# EAGLE board carillon-io-board (EAGLE 9.4.2)
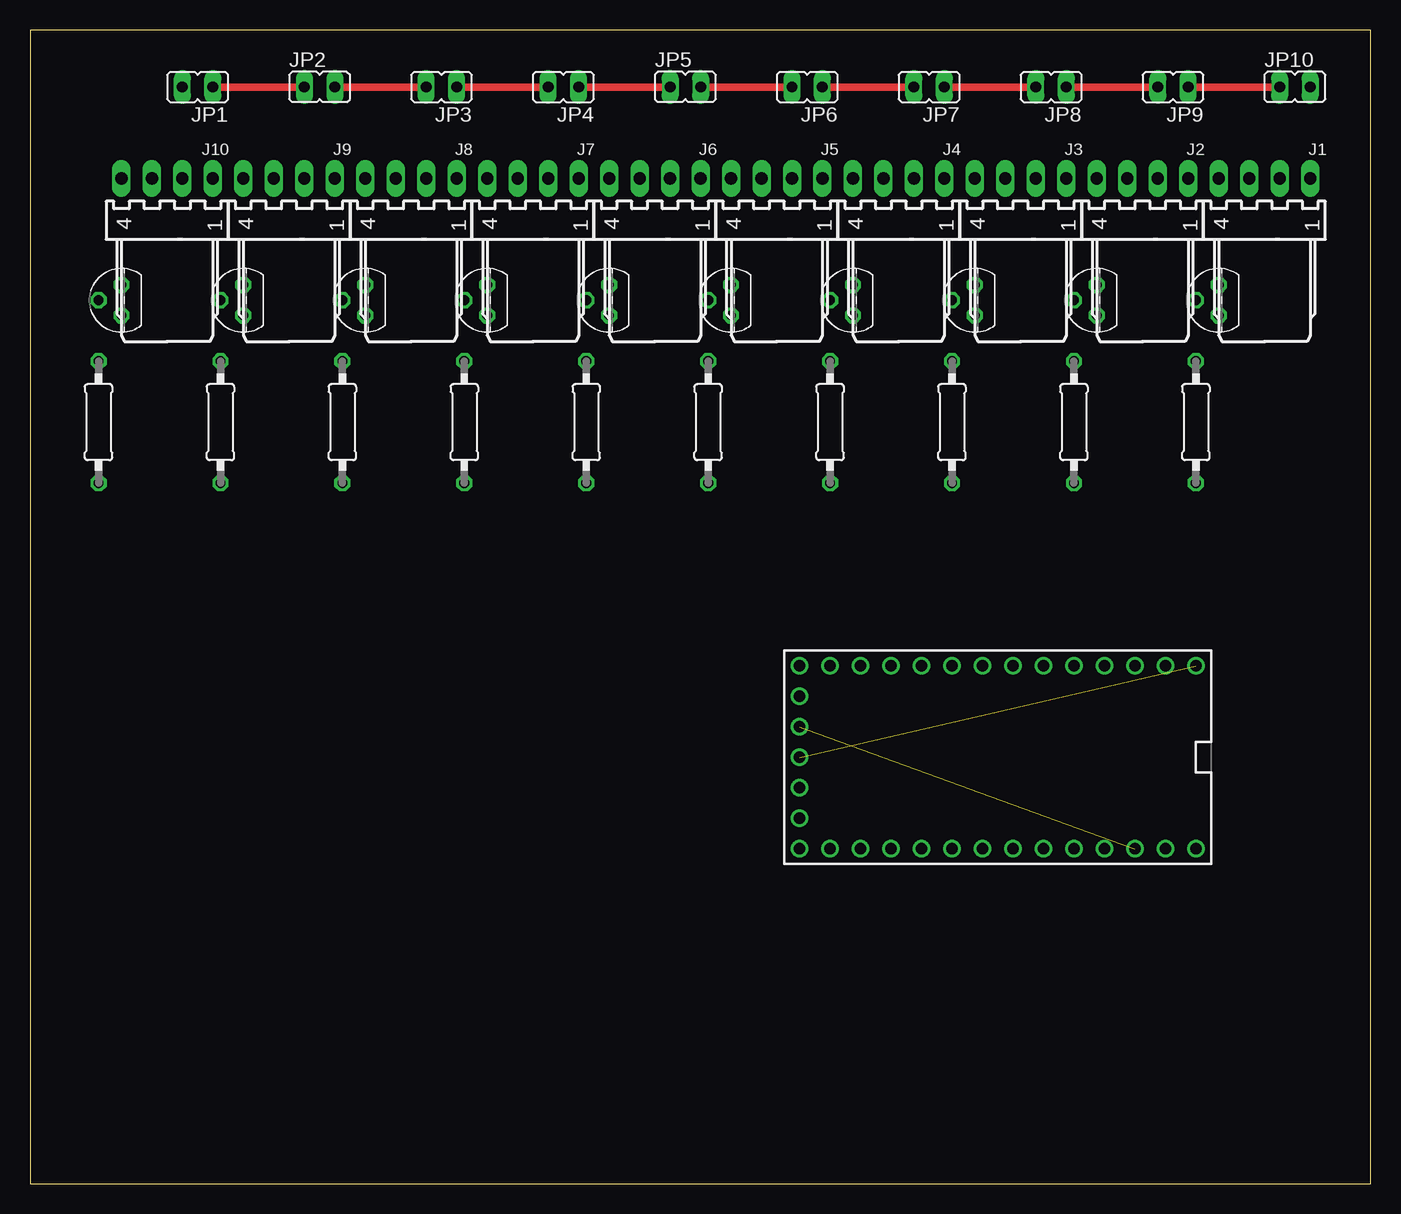
[diagram p0: board, top side]
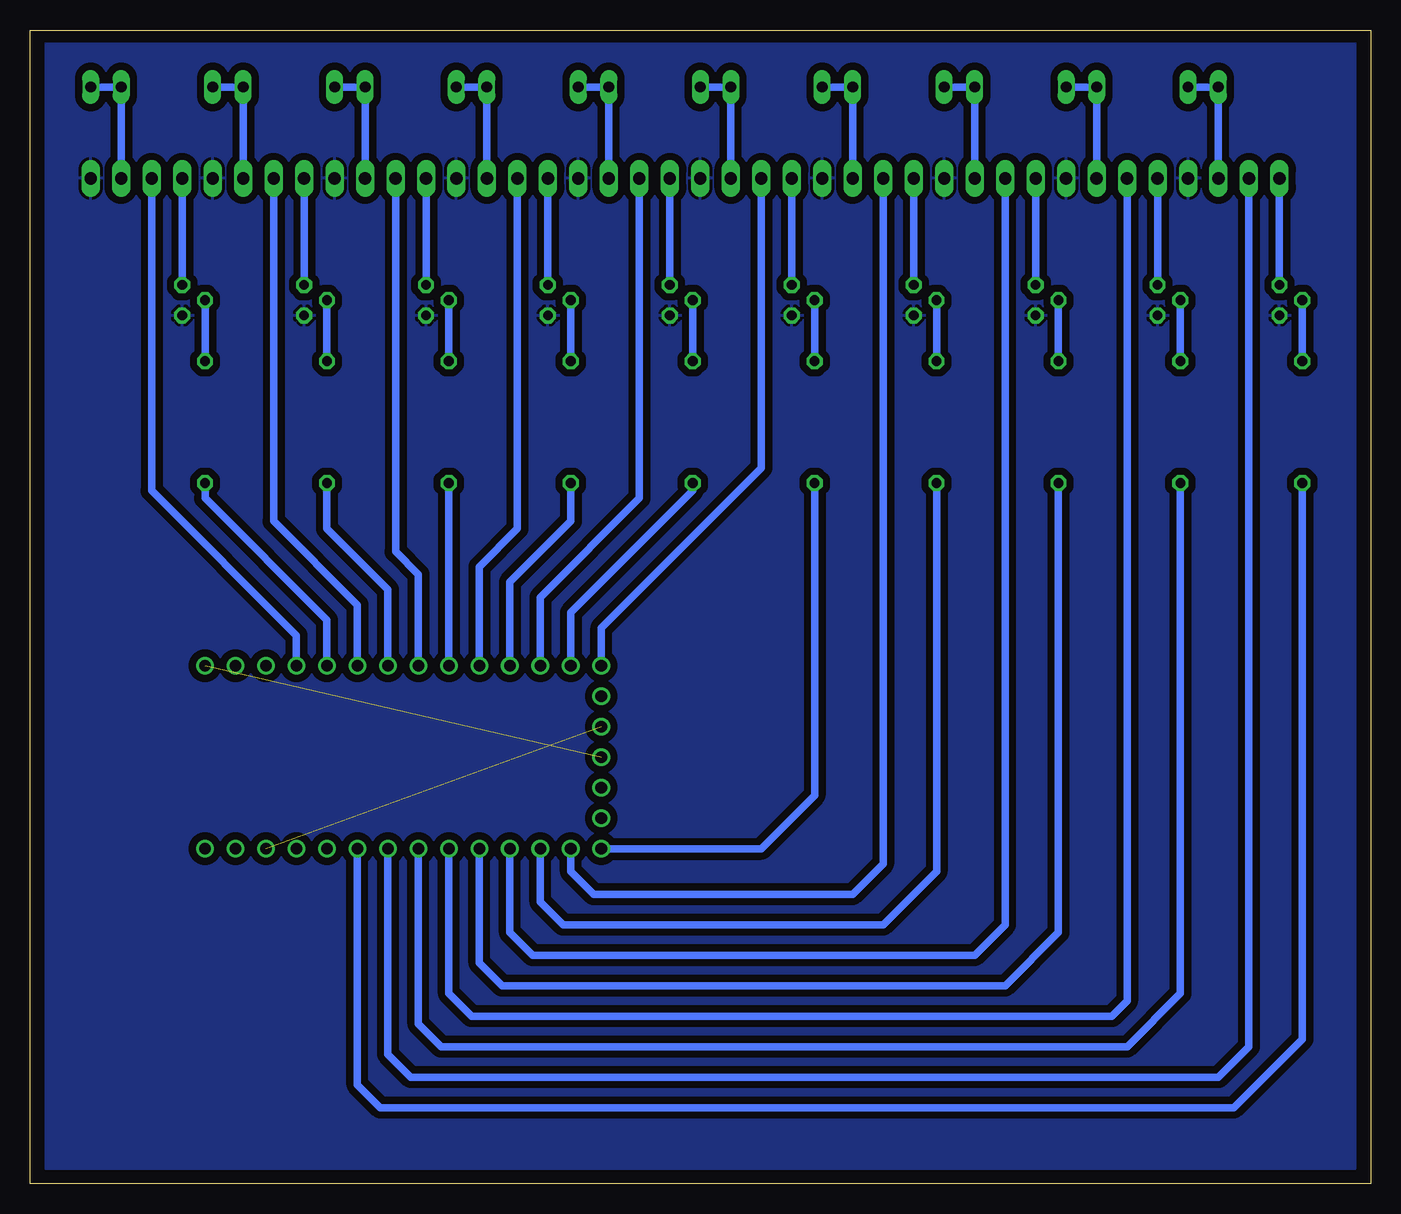
[diagram p1: board, bottom side, seen from below]

Size 111.74 x 96.19 mm. Coordinates in mm from the lower left corner, seen from the top.
Outline: 0,0 111.74,0 111.74,96.19 0,96.19 0,0
Copper layers (1*16): Top 0.035mm / dielectric 1.5mm / Bottom 0.035mm
Design rules "default": minimum track width 6mil, minimum drill 0.35mm, track to track 6mil, track to pad 6mil, pad to pad 6mil, via to via 6mil, smd to smd 6mil, copper to edge 40mil, drill to drill 6mil, minimum pad ring 10mil, minimum via ring 8mil, stop-mask expansion 4mil, vias tented up to drill 0mil, thermal gap 10mil

## Footprints (pad centres in the part's own frame; a part is rotated, then mirrored left to right if it is on the bottom)
7395-04 = drill 1.016 long: 1 3.81,0; 2 1.27,0; 3 -1.27,0; 4 -3.81,0
JP1 = drill 0.914 long: 1 0,-1.27; 2 0,1.27
0207/10 = drill 0.813 octagon: 1 -5.08,0; 2 5.08,0
TO92 = drill 0.813 octagon: 1 1.27,0; 2 0,1.905; 3 -1.27,0
TEENSY_3.0-3.2&LC_OUTER_ROW = drill 0.965: 0 -7.62,13.97; 1 -7.62,11.43; 2 -7.62,8.89; 3 -7.62,6.35; 3.3V 7.62,11.43; 3.3V1 -2.54,-16.51; 4 -7.62,3.81; 5 -7.62,1.27; 6 -7.62,-1.27; 7 -7.62,-3.81; 8 -7.62,-6.35; 9 -7.62,-8.89; 10 -7.62,-11.43; 11 -7.62,-13.97; 12 -7.62,-16.51; 13 7.62,-16.51; 14/A0 7.62,-13.97; 15/A1 7.62,-11.43; 16/A2 7.62,-8.89; 17/A3 7.62,-6.35; 18/A4 7.62,-3.81; 19/A5 7.62,-1.27; 20/A6 7.62,1.27; 21/A7 7.62,3.81; 22/A8 7.62,6.35; 23/A9 7.62,8.89; AGND 7.62,13.97; GND -7.62,16.51; GND1 0,-16.51; PGM 2.54,-16.51; RESET/DAC 5.08,-16.51; VBAT -5.08,-16.51; VIN 7.62,16.51

## Placement (x,y rotation side)
J1  22-05-7048-04  [7395-04]  102.87,83.82 0 top
J2  22-05-7048-04  [7395-04]  92.71,83.82 0 top
J3  22-05-7048-04  [7395-04]  82.55,83.82 0 top
J4  22-05-7048-04  [7395-04]  72.39,83.82 0 top
J5  22-05-7048-04  [7395-04]  62.23,83.82 0 top
J6  22-05-7048-04  [7395-04]  52.07,83.82 0 top
J7  22-05-7048-04  [7395-04]  41.91,83.82 0 top
J8  22-05-7048-04  [7395-04]  31.75,83.82 0 top
J9  22-05-7048-04  [7395-04]  21.59,83.82 0 top
J10  22-05-7048-04  [7395-04]  11.43,83.82 0 top
JP1  [JP1]  13.97,91.44 90 top
JP2  [JP1]  24.13,91.44 270 top
JP3  [JP1]  34.29,91.44 90 top
JP4  [JP1]  44.45,91.44 90 top
JP5  [JP1]  54.61,91.44 270 top
JP6  [JP1]  64.77,91.44 90 top
JP7  [JP1]  74.93,91.44 90 top
JP8  [JP1]  85.09,91.44 90 top
JP9  [JP1]  95.25,91.44 90 top
JP10  [JP1]  105.41,91.44 270 top
R1  [0207/10]  97.16,63.5 90 top
R3  [0207/10]  87,63.5 90 top
R5  [0207/10]  76.83,63.5 90 top
R7  [0207/10]  66.67,63.5 90 top
R9  [0207/10]  56.52,63.5 90 top
R11  [0207/10]  46.35,63.5 90 top
R13  [0207/10]  36.2,63.5 90 top
R15  [0207/10]  26.04,63.5 90 top
R17  [0207/10]  15.88,63.5 90 top
R19  [0207/10]  5.71,63.5 90 top
T1  2N3904  [TO92]  99.06,73.66 90 top
T2  2N3904  [TO92]  88.9,73.66 90 top
T3  2N3904  [TO92]  78.74,73.66 90 top
T4  2N3904  [TO92]  68.58,73.66 90 top
T5  2N3904  [TO92]  58.42,73.66 90 top
T6  2N3904  [TO92]  48.26,73.66 90 top
T7  2N3904  [TO92]  38.1,73.66 90 top
T8  2N3904  [TO92]  27.94,73.66 90 top
T9  2N3904  [TO92]  17.78,73.66 90 top
T10  2N3904  [TO92]  7.62,73.66 90 top
U$1  TEENSY_3.1-3.2_OUTER_ROW  [TEENSY_3.0-3.2&LC_OUTER_ROW]  80.64,35.56 270 top

## Library data of the parts
J1-J10 = con-molex; MF: MOLEX; OC_FARNELL: unknown; OC_NEWARK: unknown
JP1-JP10 = jumper
R1 R3 R5 R7 R9 R11 R13 R15 R17 R19 = resistor
T1-T10 = transistor
U$1 = Teensy_3_and_LC_Series_Boards_v1.4

## Nets
3.3V: U$1.3.3V U$1.3.3V1
12V: J1.2 J2.2 J3.2 J4.2 J5.2 J6.2 J7.2 J8.2 J9.2 J10.2 JP1.1 JP1.2 JP2.1 JP2.2 JP3.1 JP3.2 JP4.1 JP4.2 JP5.1 JP5.2 JP6.1 JP6.2 JP7.1 JP7.2 JP8.1 JP8.2 JP9.1 JP9.2 JP10.1 JP10.2
AGND: U$1.AGND
GND: J1.1 J2.1 J3.1 J4.1 J5.1 J6.1 J7.1 J8.1 J9.1 J10.1 T1.3 T2.3 T3.3 T4.3 T5.3 T6.3 T7.3 T8.3 T9.3 T10.3
IN1: J1.3 U$1.2
IN2: J2.3 U$1.4
IN3: J3.3 U$1.6
IN4: J4.3 U$1.8
IN5: J5.3 U$1.10
IN6: J6.3 U$1.12
IN7: J7.3 U$1.14/A0
IN8: J8.3 U$1.16/A2
IN9: J9.3 U$1.18/A4
IN10: J10.3 U$1.20/A6
N$1: J1.4 T1.1
N$2: J6.4 T6.1
N$3: J2.4 T2.1
N$4: J3.4 T3.1
N$5: J4.4 T4.1
N$6: J5.4 T5.1
N$7: J7.4 T7.1
N$8: J8.4 T8.1
N$9: J9.4 T9.1
N$10: J10.4 T10.1
N$31: U$1.GND U$1.GND1
OUT1: R1.1 U$1.3
OUT2: R3.1 U$1.5
OUT3: R5.1 U$1.7
OUT4: R7.1 U$1.9
OUT5: R9.1 U$1.11
OUT6: R11.1 U$1.13
OUT7: R13.1 U$1.15/A1
OUT8: R15.1 U$1.17/A3
OUT9: R17.1 U$1.19/A5
OUT10: R19.1 U$1.21/A7
T1: R1.2 T1.2
T2: R3.2 T2.2
T3: R5.2 T3.2
T4: R7.2 T4.2
T5: R9.2 T5.2
T6: R11.2 T6.2
T7: R13.2 T7.2
T8: R15.2 T8.2
T9: R17.2 T9.2
T10: R19.2 T10.2
VBAT: U$1.VBAT
VIN: U$1.VIN

## Tracks (layer width: path | path; a pad name or v marks a point on that pad's centre or on a via)
3.3V  (1 unrouted)
12V
  Top 0.61: JP10.1 JP9.1 | JP9.2 JP8.1 | JP8.2 JP7.1 | JP1.1 JP2.1 | JP2.2 JP3.2 | JP3.1 JP4.2 | JP4.1 JP5.1 | JP5.2 JP6.2 | JP6.1 JP7.2
  Bottom 0.61: JP1.1 JP1.2 J10.2 | JP2.2 JP2.1 J9.2 | JP3.1 JP3.2 J8.2 | JP4.1 JP4.2 J7.2 | JP5.2 JP5.1 J6.2 | JP6.1 JP6.2 J5.2 | JP7.1 JP7.2 J4.2 | JP8.1 JP8.2 J3.2 | JP9.1 JP9.2 J2.2 | JP10.2 JP10.1 J1.2
GND
  pour Bottom (isolate 0.61): 1.27,95.25 110.49,95.25 110.49,1.27 1.27,1.27
IN1
  Bottom 0.61: U$1.2 89.53,45.72 101.6,57.78 J1.3
IN2
  Bottom 0.61: U$1.4 84.45,48.26 91.44,55.24 J2.3
IN3
  Bottom 0.61: U$1.6 79.38,50.8 81.28,52.7 J3.3
IN4
  Bottom 0.61: U$1.8 74.3,51.44 71.12,54.61 J4.3
IN5
  Bottom 0.61: U$1.10 69.22,48.9 60.96,57.15 J5.3
IN6
  Bottom 0.61: U$1.12 64.14,46.35 50.8,59.69 J6.3
IN7
  Bottom 0.61: U$1.14/A0 66.67,26.04 64.77,24.13 43.18,24.13 40.64,26.67 J7.3
IN8
  Bottom 0.61: U$1.16/A2 71.75,20.95 69.85,19.05 33.02,19.05 30.48,21.59 J8.3
IN9
  Bottom 0.61: U$1.18/A4 76.83,15.88 74.93,13.97 21.59,13.97 20.32,15.24 J9.3
IN10
  Bottom 0.61: U$1.20/A6 81.92,10.79 80.01,8.89 12.7,8.89 10.16,11.43 J10.3
N$1
  Bottom 0.61: J1.4 T1.1
N$2
  Bottom 0.61: J6.4 T6.1
N$3
  Bottom 0.61: J2.4 T2.1
N$4
  Bottom 0.61: J3.4 T3.1
N$5
  Bottom 0.61: J4.4 T4.1
N$6
  Bottom 0.61: J5.4 T5.1
N$7
  Bottom 0.61: J7.4 T7.1
N$8
  Bottom 0.61: J8.4 T8.1
N$9
  Bottom 0.61: J9.4 T9.1
N$10
  Bottom 0.61: J10.4 T10.1
N$31  (1 unrouted)
OUT1
  Bottom 0.61: R1.1 97.16,57.15 87,46.99 U$1.3
OUT2
  Bottom 0.61: R3.1 87,54.61 81.92,49.53 U$1.5
OUT3
  Bottom 0.61: R5.1 U$1.7
OUT4
  Bottom 0.61: R7.1 66.67,55.24 71.75,50.16 U$1.9
OUT5
  Bottom 0.61: R9.1 56.52,57.78 66.67,47.62 U$1.11
OUT6
  Bottom 0.61: R11.1 46.35,32.38 50.8,27.94 U$1.13
OUT7
  Bottom 0.61: R13.1 36.2,26.04 40.64,21.59 67.31,21.59 69.22,23.5 U$1.15/A1
OUT8
  Bottom 0.61: R15.1 26.04,20.95 30.48,16.51 72.39,16.51 74.3,18.41 U$1.17/A3
OUT9
  Bottom 0.61: R17.1 15.88,15.88 20.32,11.43 77.47,11.43 79.38,13.34 U$1.19/A5
OUT10
  Bottom 0.61: R19.1 5.71,12.06 11.43,6.35 82.55,6.35 84.45,8.26 U$1.21/A7
T1
  Bottom 0.61: T1.2 R1.2
T2
  Bottom 0.61: T2.2 R3.2
T3
  Bottom 0.61: T3.2 R5.2
T4
  Bottom 0.61: T4.2 R7.2
T5
  Bottom 0.61: T5.2 R9.2
T6
  Bottom 0.61: T6.2 R11.2
T7
  Bottom 0.61: T7.2 R13.2
T8
  Bottom 0.61: T8.2 R15.2
T9
  Bottom 0.61: T9.2 R17.2
T10
  Bottom 0.61: T10.2 R19.2